# EAGLE board schmatic (EAGLE 9.6.2)
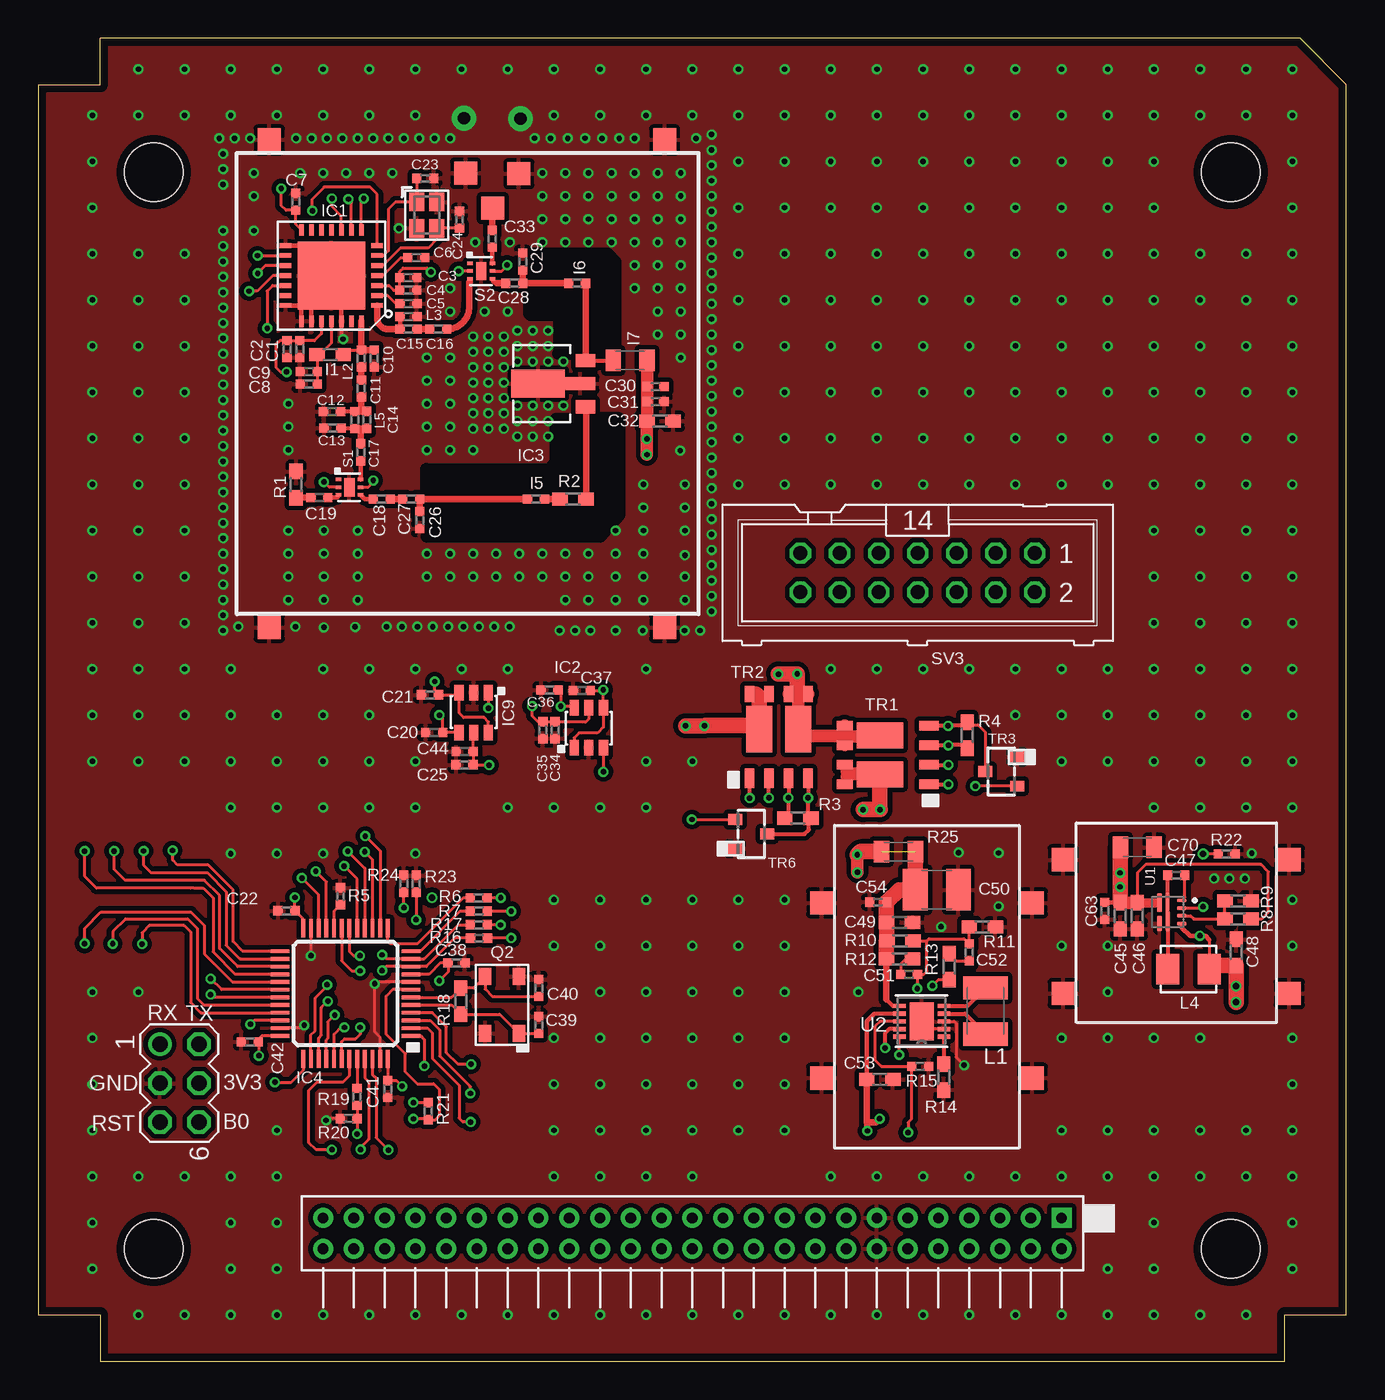
[diagram p0: board, top side]
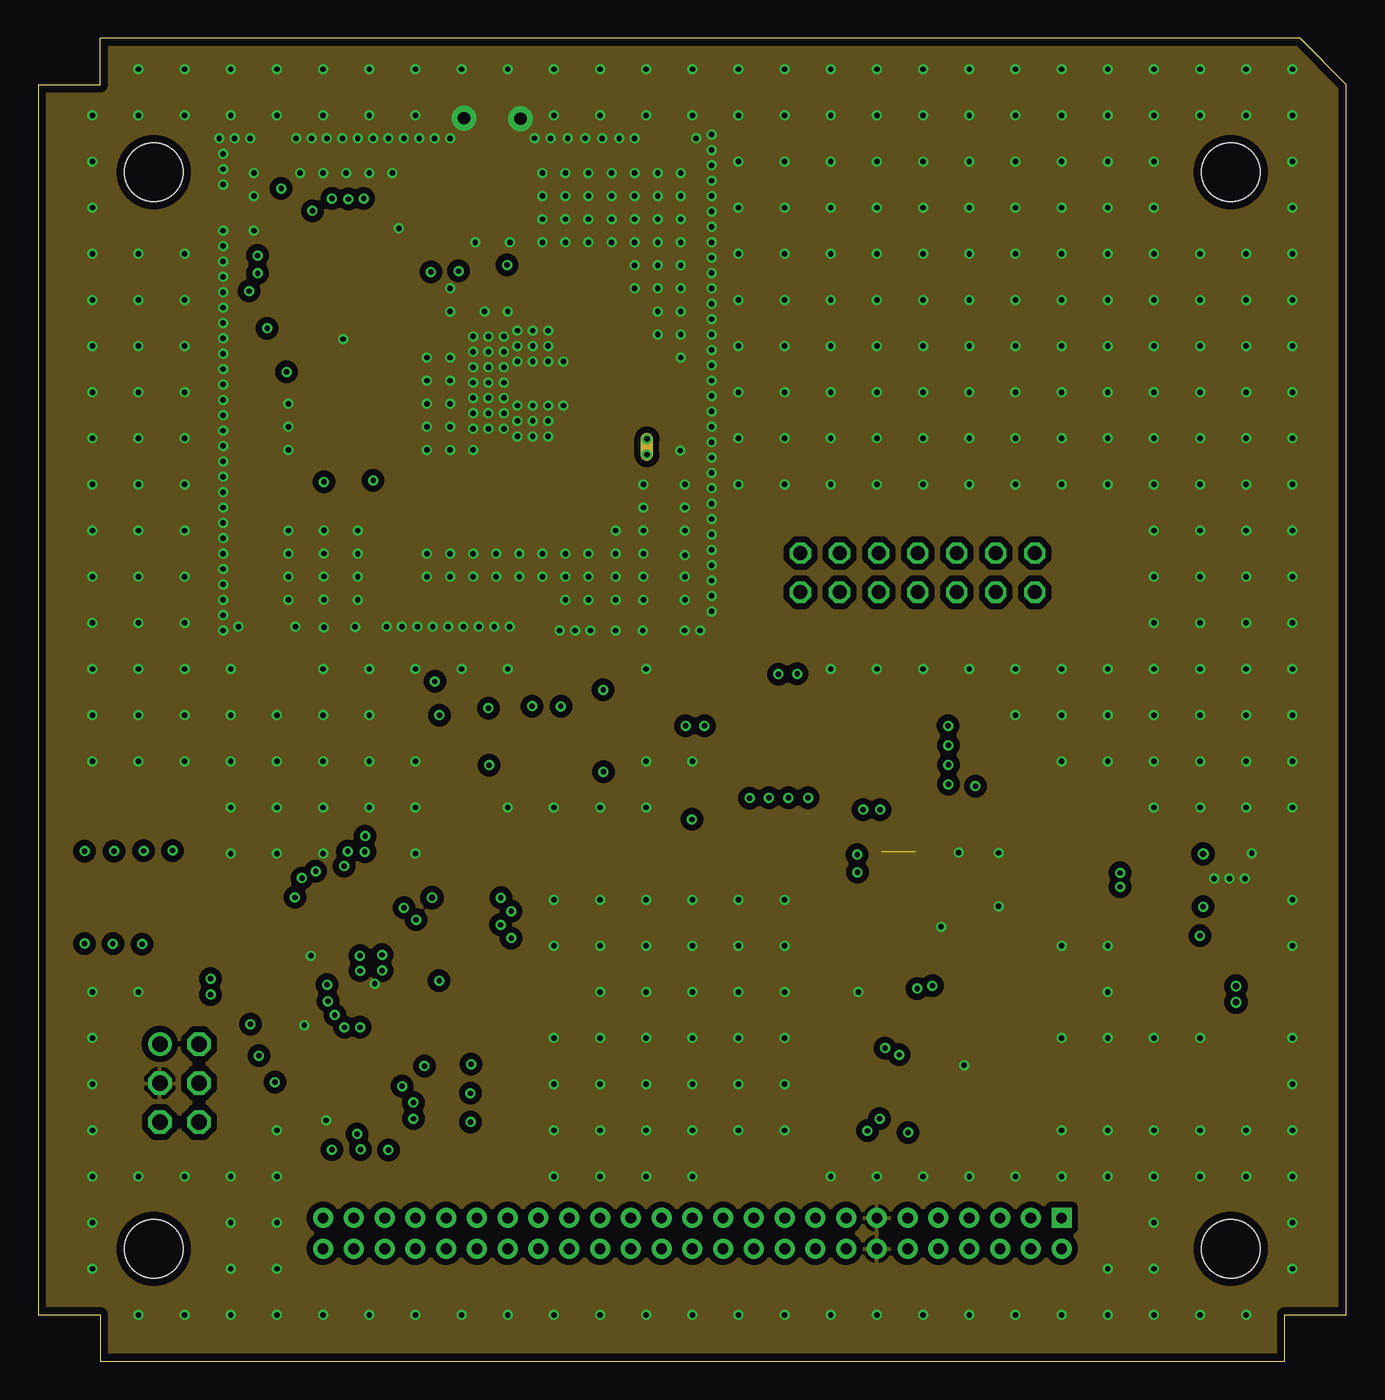
[diagram p1: board, inner layer Route2]
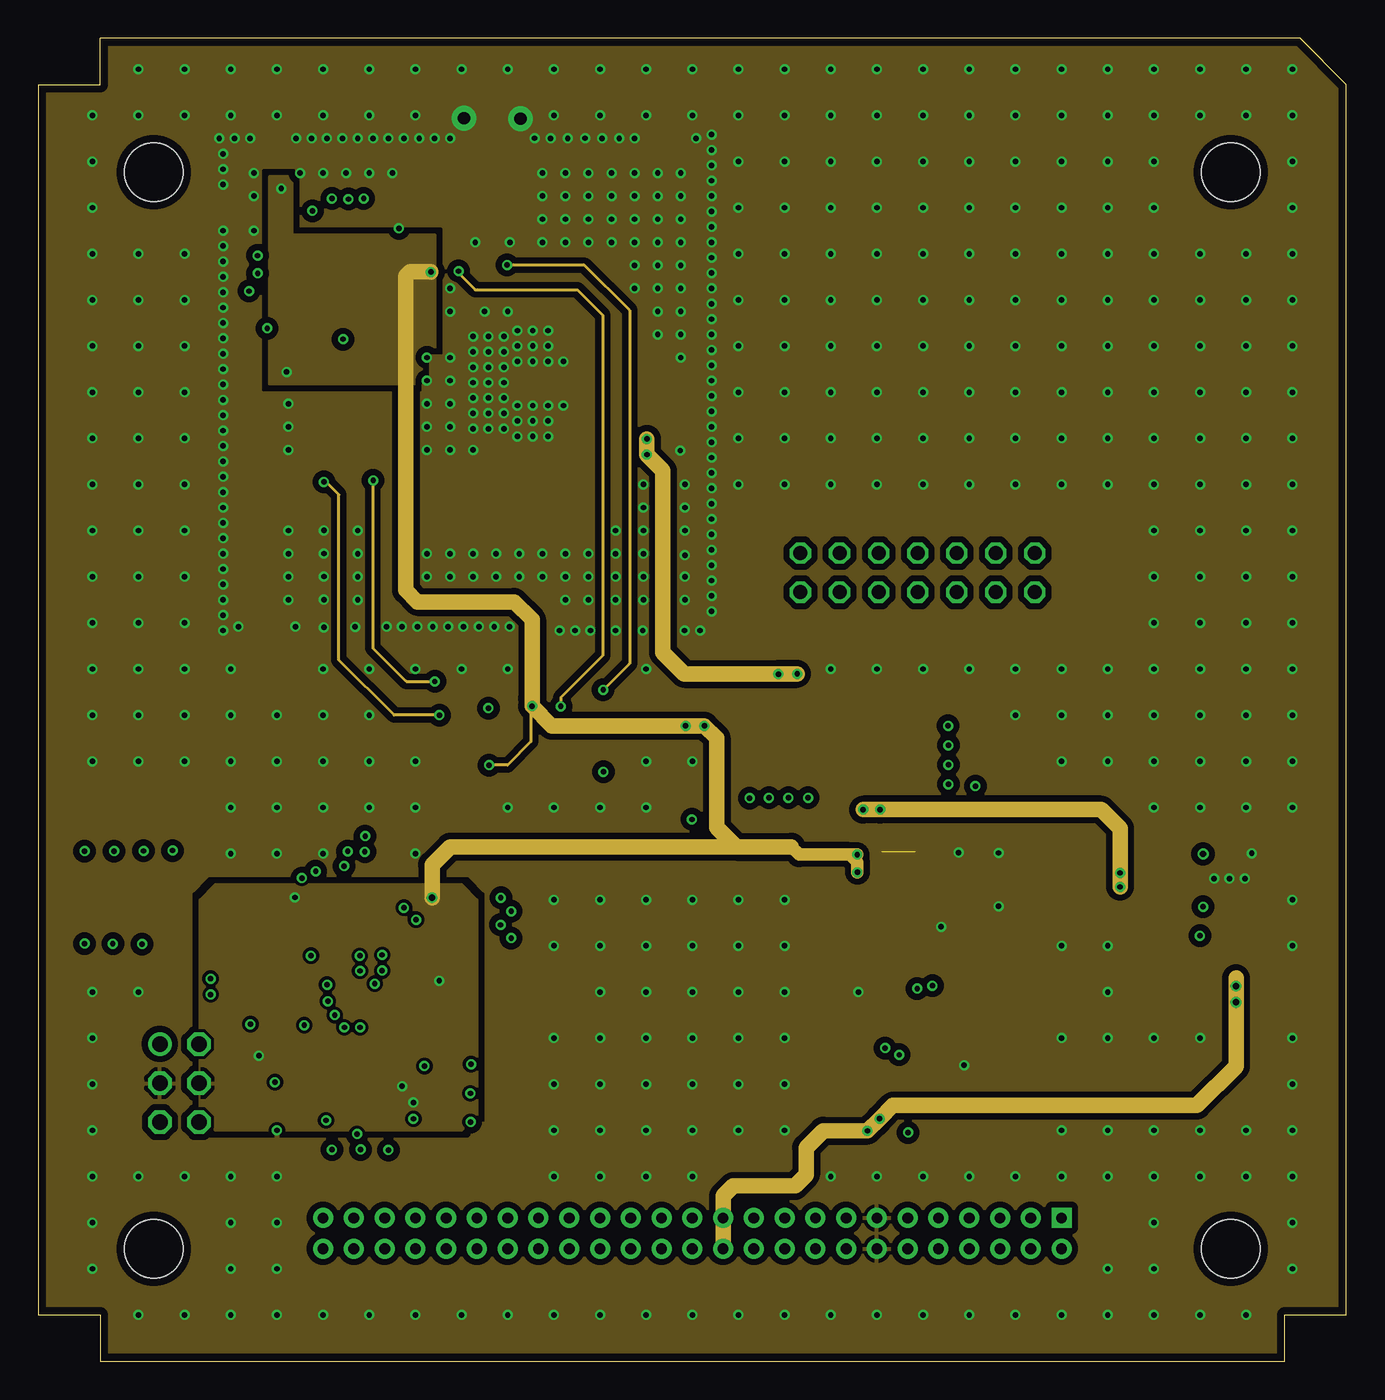
[diagram p2: board, inner layer Route15]
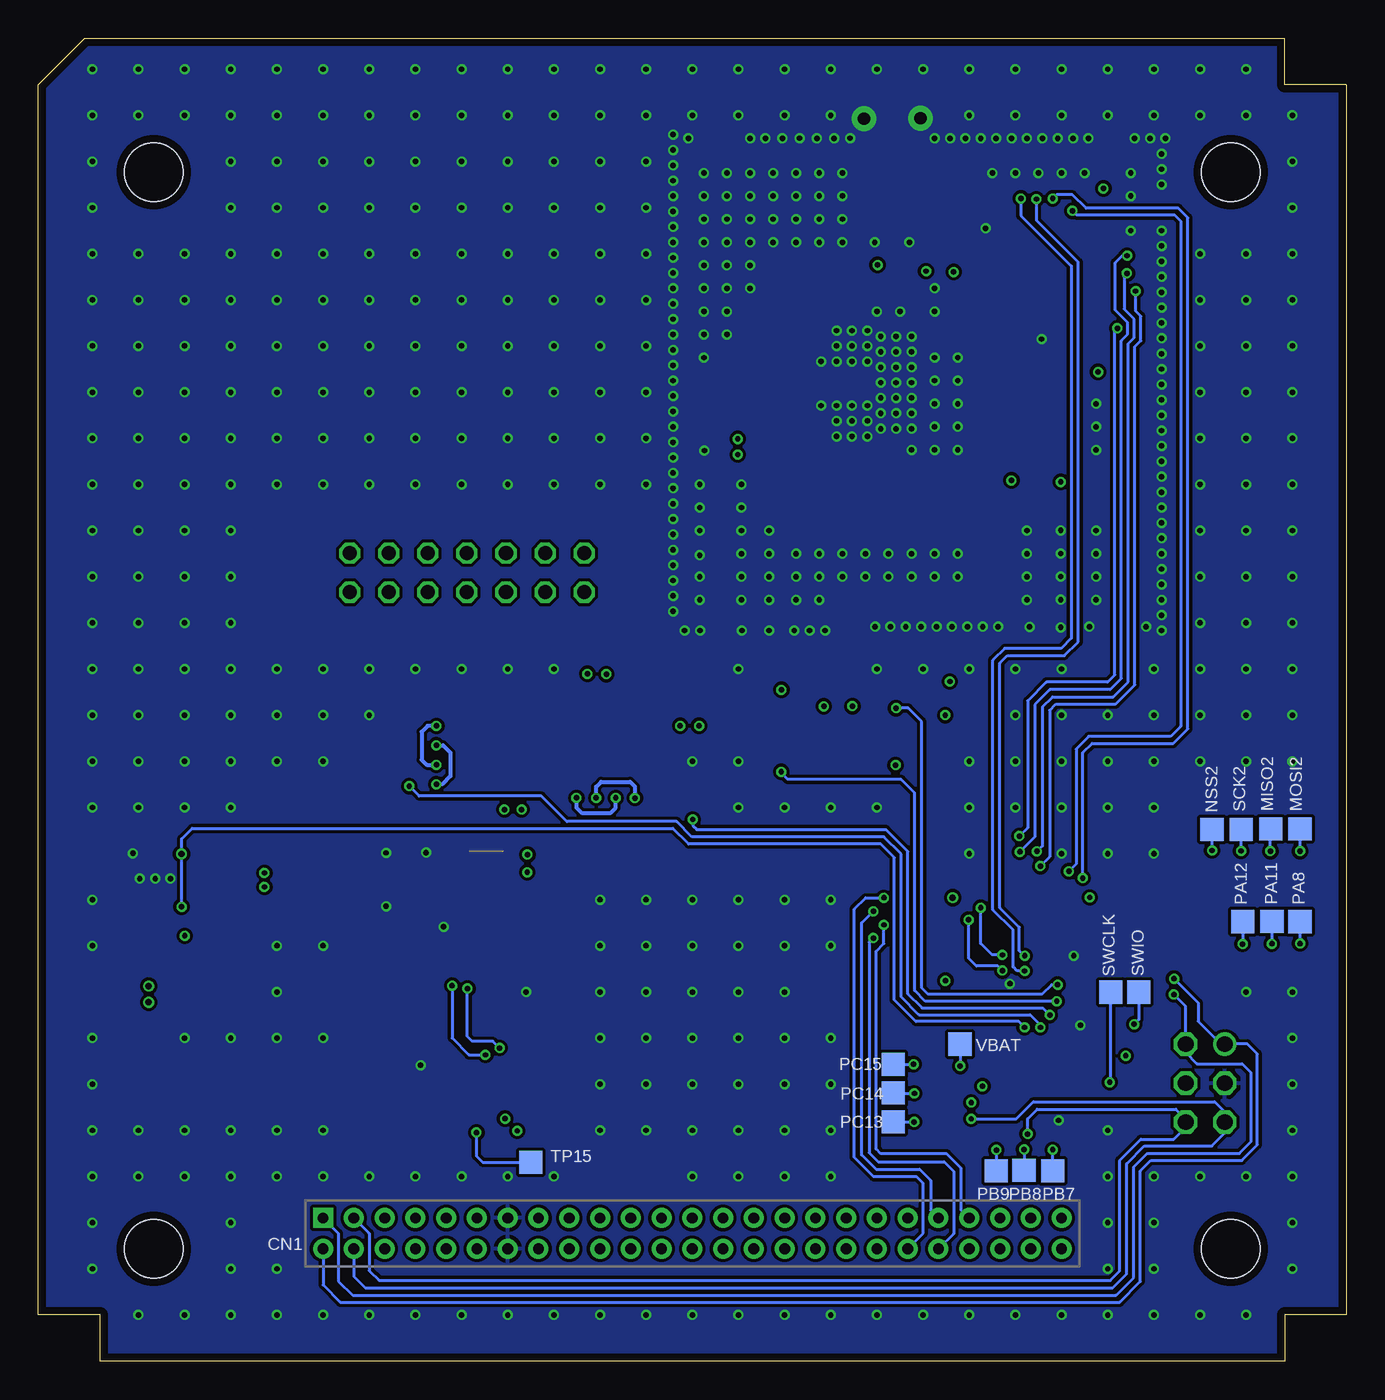
[diagram p3: board, bottom side, seen from below]

Size 85 x 86 mm. Coordinates in mm from the lower left corner, seen from the top.
Outline: 4,0 81,0 81,3 85,3 85,83 82,86 4,86 4,83 0,83 0,3 4,3 4,0
Copper layers (1+2*15+16): Top 0.018mm / dielectric 0.25mm / Route2 0.035mm / dielectric 1mm / Route15 0.035mm / dielectric 0.25mm / Bottom 0.018mm
Design rules "pban_5mil-l4": minimum track width 5mil, minimum drill 0.3mm, track to track 5mil, track to pad 0.229mm, pad to pad 5mil, via to via 5mil, smd to smd 5mil, copper to edge 0.5mm, drill to drill 0.5mm, minimum pad ring 0.15mm, minimum via ring 0.15mm, stop-mask expansion 4mil, vias tented up to drill 0.35mm, thermal gap 10mil
Net classes: 0 default: width 0.203 mm, drill 0.33 mm, clearance 0.203 mm; 2 gnd: width 0.305 mm, drill 0.33 mm, clearance 0.203 mm; 3 power usb: width 0.508 mm, drill 0.33 mm, clearance 0.203 mm
Holes 3.8 mm at 77.5,7.3 7.5,7.3 7.5,77.3 77.5,77.3
tRestrict: 19 lines

## Footprints (pad centres in the part's own frame; a part is rotated, then mirrored left to right if it is on the bottom)
M(1005)_US(0402) = smd 0.6 x 0.6: 1 -0.55,0; 2 0.55,0
CAP_(M1005)_0402 = smd 0.6 x 0.6: 1 -0.55,0; 2 0.55,0
M(1608)_US(0603) = smd 1 x 0.85: 1 -0.85,0; 2 0.85,0
C1210 = smd 1.6 x 2.7: 1 -1.4,0; 2 1.4,0
M(2012)_US(0805) = smd 1 x 1.4: 1 -1.1,0; 2 1.1,0
A3B-50PA-2DS(71) = drill 0.7 pad 1.3 square: 1 0,2 | drill 0.7 pad 1.3: 2 0,0; 3 2,2; 4 2,0; 5 4,2; 6 4,0; 7 6,2; 8 6,0; 9 8,2; 10 8,0; 11 10,2; 12 10,0; 13 12,2; 14 12,0; 15 14,2; 16 14,0; 17 16,2; 18 16,0; 19 18,2; 20 18,0; 21 20,2; 22 20,0; 23 22,2; 24 22,0; 25 24,2; 26 24,0; 27 26,2; 28 26,0; 29 28,2; 30 28,0; 31 30,2; 32 30,0; 33 32,2; 34 32,0; 35 34,2; 36 34,0; 37 36,2; 38 36,0; 39 38,2; 40 38,0; 41 40,2; 42 40,0; 43 42,2; 44 42,0; 45 44,2; 46 44,0; 47 46,2; 48 46,0; 49 48,2; 50 48,0
SX1278 = smd 0.75 x 0.3: 1 -2.975,1.95; 2 -2.975,1.3; 3 -2.975,0.65; 4 -2.975,0; 5 -2.975,-0.65; 6 -2.975,-1.3; 7 -2.975,-1.95; 15 2.975,-1.95; 16 2.975,-1.3; 17 2.975,-0.65; 18 2.975,0; 19 2.975,0.65; 20 2.975,1.3; 21 2.975,1.95 | smd 0.3 x 0.75: 8 -1.95,-2.975; 9 -1.3,-2.975; 10 -0.65,-2.975; 11 0,-2.975; 12 0.65,-2.975; 13 1.3,-2.975; 14 1.95,-2.975; 22 1.95,2.975; 23 1.3,2.975; 24 0.65,2.975; 25 0,2.975; 26 -0.65,2.975; 27 -1.3,2.975; 28 -1.95,2.975 | smd 4.4 x 4.4: 29 0,0
SOT-23-6 = smd 0.6 x 1: 1 -0.95,-1.3; 2 0,-1.3; 3 0.95,-1.3; 4 0.95,1.3; 5 0,1.3; 6 -0.95,1.3
ADL5324 = smd 0.86 x 1.27: 1 -1.5,0; 3 1.5,0 | smd 0.86 x 2: 2 0,0.365 | smd 1.8 x 3.48: 4 0,3.1
STM32F103C8T6 = smd 1.2 x 0.25: 1 -4.25,2.75; 2 -4.25,2.25; 3 -4.25,1.75; 4 -4.25,1.25; 5 -4.25,0.75; 6 -4.25,0.25; 7 -4.25,-0.25; 8 -4.25,-0.75; 9 -4.25,-1.25; 10 -4.25,-1.75; 11 -4.25,-2.25; 12 -4.25,-2.75; 25 4.25,-2.75; 26 4.25,-2.25; 27 4.25,-1.75; 28 4.25,-1.25; 29 4.25,-0.75; 30 4.25,-0.25; 31 4.25,0.25; 32 4.25,0.75; 33 4.25,1.25; 34 4.25,1.75; 35 4.25,2.25; 36 4.25,2.75 | smd 0.25 x 1.2: 13 -2.75,-4.25; 14 -2.25,-4.25; 15 -1.75,-4.25; 16 -1.25,-4.25; 17 -0.75,-4.25; 18 -0.25,-4.25; 19 0.25,-4.25; 20 0.75,-4.25; 21 1.25,-4.25; 22 1.75,-4.25; 23 2.25,-4.25; 24 2.75,-4.25; 37 2.75,4.25; 38 2.25,4.25; 39 1.75,4.25; 40 1.25,4.25; 41 0.75,4.25; 42 0.25,4.25; 43 -0.25,4.25; 44 -0.75,4.25; 45 -1.25,4.25; 46 -1.75,4.25; 47 -2.25,4.25; 48 -2.75,4.25
M(3225)_US(1210) = smd 1.5 x 2.9: 1 -1.5,0; 2 1.5,0
AMDLA3020S-1R5MT = smd 1.5 x 2: 1 -1.35,0; 2 1.35,0
TEST_POINT_1.5MM = smd 1.5 x 1.5: 1 0,0
NX2520SA = smd 1.2 x 1: 1 -0.85,-0.65; 2 0.85,-0.65; 3 0.85,0.65; 4 -0.85,0.65
ECS-80-18-30B-JEM-TR = smd 1.1 x 0.8: 1 -1.85,-1.1; 2 1.85,-1.1; 3 1.85,1.1; 4 -1.85,1.1
SKY13446 = smd 0.229 x 0.35: 1 0,0; 2 0.5,0; 3 1,0; 4 1,1.45; 5 0.5,1.45; 6 0,1.45 | smd 1.2 x 0.66: 7 0.5,0.725
MA03-2 = drill 1.016: 1 -2.54,-1.27 | drill 1.016 octagon: 2 -2.54,1.27; 3 0,-1.27; 4 0,1.27; 5 2.54,-1.27; 6 2.54,1.27
ML14 = drill 0.914 octagon: 1 -7.62,-1.27; 2 -7.62,1.27; 3 -5.08,-1.27; 4 -5.08,1.27; 5 -2.54,-1.27; 6 -2.54,1.27; 7 0,-1.27; 8 0,1.27; 9 2.54,-1.27; 10 2.54,1.27; 11 5.08,-1.27; 12 5.08,1.27; 13 7.62,-1.27; 14 7.62,1.27
SI7997DP-T1-GE3 = smd 1.27 x 0.61: 1 0,1.905; 2 0,0.635; 3 0,-0.635; 4 0,-1.905 | smd 1.02 x 0.61: 5 5.465,-1.905; 6 5.465,-0.635; 7 5.465,0.635; 8 5.465,1.905 | smd 3 x 1.7: 9 3.175,-1.27; 10 3.175,1.27
SOT346-R = smd 0.7 x 0.9: 1 0.95,-1.05; 2 -0.95,-1.05; 3 0,1.05
IC_TPS61230ARNSR = smd 0.25 x 0.6: 1 -0.75,0.9; 2 -0.25,0.9; 3 0.25,0.9; 4 0.75,0.9 | smd 2.5 x 0.279: 5 0,-0.015 | smd 1 x 0.33: 6 0.75,-0.54 | smd 1.219 x 0.33: 7 -0.6,-0.54
DFN-10_DD = smd 0.813 x 0.279: 1 -1.448,1; 2 -1.448,0.5; 3 -1.448,0; 4 -1.448,-0.5; 5 -1.448,-1; 6 1.448,-1; 7 1.448,-0.5; 8 1.448,0; 9 1.448,0.5; 10 1.448,1 | smd 1.575 x 2.489: 11 0,0

## Placement (x,y rotation side)
C1  0.1uF  [M(1005)_US(0402)]  16.99,65.8 270 top
C2  47pF  [M(1005)_US(0402)]  16.16,65.8 270 top
C3  0.1uF  [M(1005)_US(0402)]  24.04,70.44 0 top
C4  47pF  [M(1005)_US(0402)]  24.04,69.63 0 top
C5  0.1uF  [M(1005)_US(0402)]  24.05,68.76 0 top
C6  0.1uF  [M(1005)_US(0402)]  24.56,71.74 0 top
C7  0.1uF  [M(1005)_US(0402)]  16.72,75.38 90 top
C8  0.1uF  [M(1005)_US(0402)]  17.57,63.52 180 top
C9  47pF  [M(1005)_US(0402)]  17.57,64.34 180 top
C10  4.7pF  [M(1005)_US(0402)]  21.82,65.19 270 top
C11  47pF  [M(1005)_US(0402)]  20.99,63.24 270 top
C12  6.8pF  [M(1005)_US(0402)]  19.08,61.73 180 top
C13  6.8pF  [M(1005)_US(0402)]  19.11,60.66 180 top
C14  2.7pF  [M(1005)_US(0402)]  21.34,61.2 270 top
C15  4.7pF  [M(1005)_US(0402)]  24.05,67.09 0 top
C16  47pF  [M(1005)_US(0402)]  25.99,67.09 0 top
C17  47pF  [M(1005)_US(0402)]  20.94,59.09 270 top
C18  47pF  [M(1005)_US(0402)]  22.31,56.05 0 top
C19  47pF  [M(1005)_US(0402)]  18.26,56.14 180 top
C20  47pF  [M(1005)_US(0402)]  25.72,40.87 0 top
C21  47pF  [M(1005)_US(0402)]  25.45,43.32 180 top
C22  0.1uF  [M(1005)_US(0402)]  16.12,29.28 180 top
C23  15pF  [CAP_(M1005)_0402]  25.14,76.9 180 top
C24  15pF  [CAP_(M1005)_0402]  27.37,74.21 90 top
C25  0.1uF  [M(1005)_US(0402)]  27.69,38.77 180 top
C26  20pF  [M(1005)_US(0402)]  24.78,54.68 270 top
C27  20pF  [M(1005)_US(0402)]  24.23,56.05 0 top
C28  20pF  [M(1005)_US(0402)]  30.93,70.08 180 top
C29  6.2pF  [M(1005)_US(0402)]  31.48,71.48 90 top
C30  100pF  [M(1005)_US(0402)]  40.11,63.37 180 top
C31  0.01uF  [M(1005)_US(0402)]  40.11,62.39 180 top
C32  10uF  [M(1608)_US(0603)]  40.4,61.11 0 top
C33  47pF  [M(1005)_US(0402)]  29.5,72.97 90 top
C34  47pF  [M(1005)_US(0402)]  33.58,41.02 270 top
C35  0.1uF  [M(1005)_US(0402)]  32.79,41.02 270 top
C36  47pF  [M(1005)_US(0402)]  33.22,43.63 0 top
C37  47pF  [M(1005)_US(0402)]  35.32,43.61 180 top
C38  0.1uF  [M(1005)_US(0402)]  27.17,25.89 0 top
C39  20pF  [M(1005)_US(0402)]  32.52,21.85 90 top
C40  20pF  [M(1005)_US(0402)]  32.52,24.26 90 top
C41  0.1uF  [M(1005)_US(0402)]  22.7,17.69 270 top
C42  0.1uF  [M(1005)_US(0402)]  13.74,20.76 180 top
C44  47pF  [M(1005)_US(0402)]  27.7,39.63 180 top
C45  22uF  [M(1608)_US(0603)]  70.32,28.95 270 top
C46  22uF  [M(1608)_US(0603)]  71.43,28.95 270 top
C47  0.1uF  [M(1005)_US(0402)]  73.96,31.59 0 top
C48  10uF  [M(1608)_US(0603)]  77.85,26.58 90 top
C49  22uF  [M(1608)_US(0603)]  55.97,28.53 0 top
C50  100uF  [C1210]  58.39,30.65 0 top
C51  100pF  [M(1005)_US(0402)]  56.59,25.14 180 top
C52  1000pF  [M(1005)_US(0402)]  60.5,26.58 90 top
C53  10uF  [M(1608)_US(0603)]  54.69,18.32 0 top
C54  0.1uF  [M(1005)_US(0402)]  54.58,29.84 180 top
C63  0.1uF  [M(1005)_US(0402)]  69.3,29.27 270 top
C70  100uF  [M(2012)_US(0805)]  71.42,33.4 0 top
CN1  A3B-50PA-2DS(71)  [A3B-50PA-2DS(71)]  66.5,7.3 0 bottom
I1  82nH  [M(1608)_US(0603)]  18.96,65.43 0 top
I5  1.6nH  [M(1005)_US(0402)]  32.34,56.05 0 top
I6  5.6nH  [M(1005)_US(0402)]  35.01,70.08 180 top
I7  120nH  [M(2012)_US(0805)]  38.46,65.06 180 top
IC1  SX1278  [SX1278]  19.04,70.58 180 top
IC2  SN74LVC2G14DBVT  [SOT-23-6]  35.77,41.19 0 top
IC3  ADL5324  [ADL5324]  35.57,63.55 90 top
IC4  STM32F103C8T6  [STM32F103C8T6]  19.96,23.9 180 top
IC9  SN74LVC2G14DBVT  [SOT-23-6]  28.29,42.16 180 top
L1  CBC3225T150KR  [M(3225)_US(1210)]  61.56,22.76 90 top
L2  15nH  [M(1005)_US(0402)]  20.99,65.19 270 top
L3  18nH  [M(1005)_US(0402)]  24.05,67.92 0 top
L4  1uH  [AMDLA3020S-1R5MT]  74.76,25.48 0 top
L5  12nH  [M(1005)_US(0402)]  20.55,61.19 270 top
MISO2  TEST_POINT  [TEST_POINT_1.5MM]  4.9,34.6 90 bottom
MOSI2  TEST_POINT  [TEST_POINT_1.5MM]  3,34.6 90 bottom
NSS2  TEST_POINT  [TEST_POINT_1.5MM]  8.72,34.57 0 bottom
PA8  TEST_POINT  [TEST_POINT_1.5MM]  3,28.57 90 bottom
PA11  TEST_POINT  [TEST_POINT_1.5MM]  4.82,28.58 90 bottom
PA12  TEST_POINT  [TEST_POINT_1.5MM]  6.73,28.57 90 bottom
PB7  TEST_POINT  [TEST_POINT_1.5MM]  19.06,12.38 0 bottom
PB8  TEST_POINT  [TEST_POINT_1.5MM]  20.94,12.41 0 bottom
PB9  TEST_POINT  [TEST_POINT_1.5MM]  22.74,12.38 0 bottom
PC13  TEST_POINT  [TEST_POINT_1.5MM]  29.43,15.55 270 bottom
PC14  TEST_POINT  [TEST_POINT_1.5MM]  29.43,17.44 0 bottom
PC15  TEST_POINT  [TEST_POINT_1.5MM]  29.43,19.3 90 bottom
Q1  NX2520SA-32MHZ  [NX2520SA]  25.24,74.51 270 top
Q2  8MHZ_CRYSTAL  [ECS-80-18-30B-JEM-TR]  30.13,23.15 90 top
R1  50  [M(1608)_US(0603)]  16.74,56.99 270 top
R2  2  [M(1608)_US(0603)]  34.74,56.05 0 top
R3  22k  [M(1608)_US(0603)]  49.36,35.3 180 top
R4  22k  [M(1608)_US(0603)]  60.38,40.7 270 top
R5  100k  [M(1005)_US(0402)]  19.63,30.23 270 top
R6  100  [M(1005)_US(0402)]  28.61,30.12 180 top
R7  100  [M(1005)_US(0402)]  28.62,29.26 180 top
R8  316k  [M(1608)_US(0603)]  77.97,28.74 0 top
R9  100k  [M(1608)_US(0603)]  77.97,29.93 180 top
R10  820k  [M(1608)_US(0603)]  56,27.32 180 top
R11  180k  [M(1608)_US(0603)]  61.35,28.22 180 top
R12  15k  [M(1608)_US(0603)]  55.97,26.14 0 top
R13  49.9k  [M(1608)_US(0603)]  59.19,25.65 270 top
R14  332k  [M(1608)_US(0603)]  58.84,18.47 270 top
R15  10k  [M(1005)_US(0402)]  57.31,19.17 180 top
R16  100  [M(1005)_US(0402)]  28.63,27.5 180 top
R17  100  [M(1005)_US(0402)]  28.62,28.37 180 top
R18  1M  [M(1608)_US(0603)]  27.45,23.4 270 top
R19  100k  [M(1005)_US(0402)]  20.7,17.18 270 top
R20  10k  [M(1005)_US(0402)]  20.16,15.77 0 top
R21  10k  [M(1005)_US(0402)]  25.33,16.25 90 top
R22  10k  [M(1005)_US(0402)]  77.23,32.97 180 top
R23  100K  [M(1005)_US(0402)]  24.56,31.04 270 top
R24  100K  [M(1005)_US(0402)]  23.75,31.04 270 top
R25  NS  [M(2012)_US(0805)]  55.9,33.13 0 top
S1  SKY13446  [SKY13446]  19.49,57.32 270 top
S2  SKY13446  [SKY13446]  28.06,71.37 270 top
SCK2  TEST_POINT  [TEST_POINT_1.5MM]  6.83,34.58 90 bottom
SV2  [MA03-2]  9.16,18.07 270 top
SV3  [ML14]  57.15,51.26 180 top
SWCLK  TEST_POINT  [TEST_POINT_1.5MM]  15.3,23.99 270 bottom
SWIO  TEST_POINT  [TEST_POINT_1.5MM]  13.47,23.99 90 bottom
TP1  TEST_POINT  [TEST_POINT_1.5MM]  50.9,29.8 0 top
TP2  TEST_POINT  [TEST_POINT_1.5MM]  50.9,18.4 0 top
TP3  TEST_POINT  [TEST_POINT_1.5MM]  64.6,18.4 0 top
TP4  TEST_POINT  [TEST_POINT_1.5MM]  66.6,32.6 0 top
TP5  TEST_POINT  [TEST_POINT_1.5MM]  66.6,23.9 0 top
TP6  TEST_POINT  [TEST_POINT_1.5MM]  81.3,23.9 0 top
TP7  TEST_POINT  [TEST_POINT_1.5MM]  81.3,32.6 0 top
TP8  TEST_POINT  [TEST_POINT_1.5MM]  40.7,47.7 0 top
TP9  TEST_POINT  [TEST_POINT_1.5MM]  15,47.7 0 top
TP10  TEST_POINT  [TEST_POINT_1.5MM]  40.7,79.4 0 top
TP11  TEST_POINT  [TEST_POINT_1.5MM]  15,79.4 0 top
TP12  TEST_POINT  [TEST_POINT_1.5MM]  27.76,77.24 0 top
TP13  TEST_POINT  [TEST_POINT_1.5MM]  31.23,77.2 0 top
TP14  TEST_POINT  [TEST_POINT_1.5MM]  29.52,74.96 0 top
TP15  TEST_POINT  [TEST_POINT_1.5MM]  53,12.92 0 bottom
TP17  TEST_POINT  [TEST_POINT_1.5MM]  64.6,29.8 0 top
TR1  SI7997DP-T1-GE3  [SI7997DP-T1-GE3]  57.87,39.41 180 top
TR2  SI7997DP-T1-GE3  [SI7997DP-T1-GE3]  48.12,37.91 90 top
TR3  DTC144EKA  [SOT346-R]  62.58,38.33 90 top
TR6  DTC144EKA  [SOT346-R]  46.33,34.27 270 top
U1  TPS61230ARNSR  [IC_TPS61230ARNSR]  73.41,29.2 270 top
U2  LTC3536EDD  [DFN-10_DD]  57.41,22.09 180 top
VBAT  TEST_POINT  [TEST_POINT_1.5MM]  25.1,20.61 0 bottom

## Library data of the parts
C1-C22 C25-C42 C44-C49 C51-C54 C63 C70 I1 I5-I7 L1-L3 L5 R1-R25 = Tharindu_lib
C23 C24 IC1-IC4 IC9 L4 MISO2 MOSI2 NSS2 PA8 PA11 PA12 PB7-PB9 PC13-PC15 Q1 Q2 S1 S2 SCK2 SWCLK SWIO TP1-TP15 TP17 TR1 TR2 VBAT = Tharindu
C50 = adafruit
CN1 = Tharindu1
SV2 = con-lstb; OC_FARNELL: unknown; OC_NEWARK: unknown
SV3 = con-ml; OC_FARNELL: unknown; OC_NEWARK: unknown
TR3 TR6 = BIRDS3_CAM_MSN
U1 = TPS61230ARNSR; AVAILABILITY: In Stock; DESCRIPTION: 5-V/6-A High Efficiency Step-Up Converter in 2.0-mm x 2.0-mm QFN Package; MF: Texas Instruments; MP: TPS61230ARNSR; PACKAGE: VQFN-HR-7 Texas Instruments; PRICE: None; PURCHASE-URL: https://pricing.snapeda.com/search/part/TPS61230ARNSR/?ref=eda
U2 = LTC3536EDD_TRPBF; AVAILABILITY: In Stock; DESCRIPTION: 1A Low Noise, Buck-Boost DC/DC Converter; MF: Analog Devices; MP: LTC3536EDD#TRPBF; PACKAGE: DFN -10 Analog Devices; PRICE: None; PURCHASE-URL: https://pricing.snapeda.com/search/part/LTC3536EDD#TRPBF/?ref=eda

## Nets
5VB_EN: IC4.42 R22.2 U1.2
+3V1: C5.1 IC1.2
+3V2: C6.1 IC1.4
+3V3: C1.1 C2.1 C3.1 C4.1 C7.1 C22.1 C25.1 C34.1 C35.1 C38.1 C41.1 C42.1 C44.1 C49.1 C50.1 C54.1 IC1.3 IC1.14 IC1.24 IC2.5 IC4.9 IC4.24 IC4.36 IC4.48 IC9.5 R10.2 R12.1 R21.2 R25.1 R25.2 SV2.4 TR2.7 TR2.8 TR2.10 U2.6
+3V4: C8.1 C9.1 I1.1 IC1.25
+3V5: C30.1
+5V: C45.1 C46.1 C63.1 C70.1 R8.2 TR1.7 TR1.8 TR1.10 U1.7
AMP_3VEN: IC4.40 TR6.2
AMP_5VEN: IC4.41 TR3.2
AMPIN: C18.2 C27.1
AMPPWR: C30.2 C31.2 C32.1 I7.1 TR1.5 TR1.6 TR1.9 TR2.5 TR2.6 TR2.9
C_UART_RX: IC4.13 R6.2
C_UART_TX: IC4.12 R7.2
CP_DIO_1: CN1.42 R16.1
CP_DIO_2: CN1.43 R17.1
CP_UART_RX: CN1.40 R6.1
CP_UART_TX: CN1.41 R7.1
CW_KEY: IC4.38 IC9.1
DIO0: IC1.8 IC4.19
DIO1: IC1.9 IC4.18
DIO2: IC1.10 IC4.22
GND: C1.2 C2.2 C3.2 C4.2 C5.2 C6.2 C7.2 C8.2 C9.2 C10.2 C12.2 C13.2 C20.1 C21.2 C22.2 C23.1 C24.2 C25.2 C26.2 C29.2 C31.1 C32.2 C34.2 C35.2 C36.1 C37.2 C38.2 C39.2 C40.2 C41.2 C42.2 C44.2 C45.2 C46.2 C48.2 C49.2 C50.2 C53.2 C54.2 C63.2 C70.2 CN1.13 CN1.14 IC1.15 IC1.21 IC1.22 IC1.23 IC1.26 IC1.29 IC2.2 IC3.2 IC3.4 IC4.8 IC4.23 IC4.35 IC4.47 IC9.2 L3.2 Q1.2 Q1.4 Q2.2 Q2.4 R1.1 R5.1 R9.1 R11.1 R14.2 R15.1 R20.1 R22.1 R23.1 R24.1 S1.7 S2.7 SV2.3 TP1.1 TP2.1 TP3.1 TP4.1 TP5.1 TP6.1 TP7.1 TP8.1 TP9.1 TP10.1 TP11.1 TP12.1 TP13.1 TP17.1 TR3.1 TR6.1 U1.6 U2.2 U2.3 U2.11
MISO: IC1.17 IC4.16
MOSI: IC1.18 IC4.17
N$1: C11.1 L2.2
N$2: C11.2 C12.1 C14.1 L5.1
N$3: C13.1 C14.2 C17.1 L5.2
N$4: C17.2 S1.6
N$5: C15.2 C16.1
N$6: C18.1 S1.4
N$7: C19.1 S1.3
N$8: C19.2 R1.2
N$9: C26.1 C27.2 I5.1
N$10: C37.1 IC2.1 IC2.4 S2.5
N$11: C20.2 IC9.4 S1.2
N$12: I5.2 R2.1
N$13: IC3.1 R2.2
N$14: I6.1 I7.2 IC3.3
N$15: C28.1 C29.1 I6.2
N$16: C28.2 S2.4
N$17: C33.1 S2.6
N$18: R4.2 TR1.1 TR1.3
N$19: R3.2 TR2.1 TR2.3
N$20: C36.2 IC2.6 S2.2
N$22: R4.1 TR1.2 TR1.4 TR3.3
N$23: R3.1 TR2.2 TR2.4 TR6.3
N$24: IC4.10 R16.2 R23.2
N$25: IC4.20 R5.2
N$26: IC4.11 R17.2 R24.2
N$27: C21.1 IC9.3 IC9.6 S1.5
N$28: C39.1 IC4.5 Q2.1 R18.2
N$29: C40.1 IC4.6 Q2.3 R18.1
N$30: L1.1 U2.4
N$31: R8.1 R9.2 U1.3
N$32: C47.1 L4.1 U1.5
N$33: L1.2 U2.5
N$34: C47.2 U1.1
N$35: IC4.1 VBAT.1
N$36: C51.2 R12.2
N$37: C51.1 C52.2 R10.1 R11.2 U2.9
N$38: IC4.44 R19.1
N$39: C52.1 R13.1
N$40: R13.2 U2.10
N$41: R14.1 U2.1
N$42: IC4.4 PC15.1
N$44: IC4.3 PC14.1
N$45: IC4.2 PC13.1
N$46: IC4.27 MISO2.1
N$47: IC4.28 MOSI2.1
N$48: IC4.33 PA12.1
N$49: IC4.32 PA11.1
N$50: IC4.29 PA8.1
N$68: IC4.26 SCK2.1
N$69: IC4.25 NSS2.1
NSSL: IC1.19 IC4.14
NTRX_EN: R15.2 TP15.1 U2.8
PB7: IC4.43 PB7.1
PB8: IC4.45 PB8.1
PB9: IC4.46 PB9.1
PROG_BOOT0: CN1.3 R19.2 R20.2 SV2.6
PROG_RST: CN1.4 IC4.7 R21.1 SV2.5
PROG_RX: CN1.1 IC4.31 SV2.2
PROG_TX: CN1.2 IC4.30 SV2.1
RF_RX: C16.2 S2.3
RFI: C15.1 IC1.1 L3.1
RFO: C10.1 I1.2 IC1.28 L2.1
RST_L: IC1.7 IC4.21
RX/TX_CON: IC2.3 IC4.39
SCK: IC1.16 IC4.15
SWCLK: IC4.37 SWCLK.1
SWIO: IC4.34 SWIO.1
TOANT: C33.2 TP14.1
UNREG1: C48.1 C53.1 CN1.23 CN1.24 L4.2 U1.4 U2.7
XTA: C24.1 IC1.5 Q1.3
XTB: C23.2 IC1.6 Q1.1

## Tracks (layer width: path | path; a pad name or v marks a point on that pad's centre or on a via)
5VB_EN  (via drill 0.35, 0.41)
  Top 0.203: IC4.42 19.71,20.77 19.9,20.96 20.62,20.96 20.9,21.24 v20.9,21.7 | U1.2 75.61,29.45 v75.7,29.54 | R22.2 v75.7,32.97
  Bottom 0.203: v20.9,21.7 21.28,22.08 27.97,22.08 29.36,23.47 29.36,32.74 30.24,33.62 42.74,33.62 43.76,34.64 75.01,34.64 75.7,33.95 v75.7,32.97 v75.7,29.54
+3V1
  Top 0.203: C5.1 23.22,68.76 22.7,69.28 IC1.2
+3V2
  Top 0.203: IC1.4 22.38,70.58 23.54,71.74 C6.1
+3V3  (via drill 0.35, 0.41)  (1 unrouted)
  Top 0.203: IC1.3 22.79,69.93 23.09,69.63 C4.1 C3.1 23.49,70.86 23.7,71.07 25.27,71.07 v25.51,70.83 v25.51,70.82 | IC1.24 18.39,66.8 17.94,66.35 C1.1 C2.1 15.67,66.35 15.43,66.11 15.43,64.63 15.74,64.32 v16.13,64.32 | IC2.5 35.77,41.75 35.57,41.55 33.6,41.55 C34.1 C35.1 32.48,41.57 32.09,41.96 v32.09,42.58 | IC1.14 16.72,73.92 C7.1 16.09,74.83 15.78,75.14 v15.78,76.24 | U2.6 55.53,23.09 | IC9.5 28.25,40.82 C44.1 C25.1 29.27,38.77 v29.29,38.75 | IC4.24 17.21,28.74 C22.1 v16.67,30.15 | IC4.9 25.39,25.15 26.13,25.89 C38.1 26.62,25.3 v26.05,24.73 | IC4.48 C41.1 23.27,18.24 v23.64,17.87 | IC4.36 14.52,21.15 14.29,20.92 C42.1 14.33,20.72 v14.33,19.85 | R21.2 v24.38,16.8 v24.37,16.81
  Top 0.254: 55.53,23.09 55.12,23.5
  Top 0.305: 55.12,27.29 R10.2
  Top 0.406: 55.12,23.5 R12.1
  Top 0.508: TR2.8 46.63,43.38 TR2.7 | 47.09,41.73 47.36,41.46 46.98,41.09 TR2.10
  Top 0.813: 53.23,32.6 53.22,32.61 v53.22,32.93 v53.23,32.92 v53.23,31.78
  Top 1.016: v42.06,41.31 v43.29,41.31 43.3,41.33 46.61,41.33 TR2.10 46.85,43.16 46.63,43.38 | R12.1 55.12,27.29 | R10.2 55.15,28.5 C49.1 C54.1 55.94,30.65 C50.1 R25.2 | R25.1 53.44,33.13 v53.23,32.92
  Route15 0.203: v29.29,38.75 30.49,38.75 32.01,40.27 32.01,42.65 32.09,42.73 32.09,43.09
  Route15 0.813: 52.71,32.93 49.44,32.93 48.94,33.43 | 52.71,32.93 v53.22,32.93 | 52.71,32.93 53.23,32.41 v53.23,31.78
  Route15 1.016: 45.36,33.43 44.08,34.71 44.08,40.52 v43.29,41.31 v42.06,41.31 33.35,41.31 v32.08,42.58 v32.09,42.58 32.09,43.09 32.09,48.2 30.92,49.37 24.64,49.37 23.88,50.12 23.88,70.54 24.17,70.83 v25.5,70.83 v25.51,70.82 | 45.36,33.43 48.94,33.43 | v25.58,30.13 25.58,32.26 26.75,33.43 45.36,33.43
  pour Route15 (isolate 0.406): 25.78,73.22 16.5,73.22 16.5,77 15,77 15,63.55 25.78,63.55
  pour Route15: 11.5,31 27.5,31 28.5,30 28.5,16 27.5,15 11.5,15 10.5,16 10.5,30
+3V4
  Top 0.203: IC1.25 19.04,66.2 18.27,65.43 I1.1 C9.1 C8.1
+5V  (via drill 0.35)
  Top 0.203: R8.2 79.51,28.74 79.95,29.18 79.95,31.82 79.48,32.29 71.97,32.29 71.43,31.75 C46.1
  Top 0.254: U1.7 72.58,29.8
  Top 0.305: C63.1 70.3,29.82 C45.1
  Top 0.508: TR1.7 52.41,38.35 | 52.41,38.35 52.41,38 | 52.41,38 TR1.8 | 52.41,38 54.7,38 TR1.10 54.48,38.35 52.41,38.35
  Top 0.61: 72.58,29.8 C46.1
  Top 0.813: C45.1 C46.1
  Top 1.016: TR1.10 54.7,35.88 v54.71,35.86 v53.6,35.86 | C45.1 v70.32,31.73 v70.31,31.74 C70.1
  Route15 1.016: v70.31,30.83 v70.31,31.74 70.31,34.64 69.09,35.86 v54.71,35.86 v53.6,35.86
AMP_3VEN  (via drill 0.35)
  Top 0.203: v19.26,22.5 18.8,22.04 18.8,20.97 18.71,20.88 IC4.40 | v42.47,35.22 TR6.2
  Bottom 0.203: v19.26,22.5 19.72,22.96 27.56,22.96 28.48,23.88 28.48,33.12 29.92,34.56 42.22,34.56 42.47,34.81 v42.47,35.22
AMP_5VEN  (via drill 0.35)
  Top 0.203: TR3.2 v60.9,37.38 | IC4.41 19.21,21.25 19.66,21.7 v19.88,21.7
  Bottom 0.203: v60.9,37.38 60.26,36.74 52.31,36.74 50.65,35.08 43.52,35.08 42.53,34.09 30.06,34.09 28.93,32.96 28.93,23.68 27.77,22.52 20.55,22.52 19.88,21.85 v19.88,21.7
AMPIN
  Top 0.42: C18.2 C27.1
AMPPWR  (via drill 0.35)
  Top 0.203: v48.09,44.66 v48.1,44.67 48.1,44.69
  Top 0.254: TR2.9 | TR2.9 49.18,41.29 48.76,41.72 | 50.02,41.73 TR2.9
  Top 0.813: TR2.6 49.38,43.38 | 49.38,43.38 TR2.5 | TR1.5 52.41,40.62 | TR1.6 52.41,40.62 | TR1.9 54.63,40.62 52.41,40.62 | 52.41,40.62 52.37,40.66 49.81,40.66 49.18,41.29 | TR2.9 49.39,43.37 49.38,43.38 | v39.55,58.94 v39.55,59.96 C32.1 C31.2 C30.2 I7.1
  Top 1.016: 49.38,43.38 49.32,43.44 v49.32,44.69 48.1,44.69
  Route2 0.813: v39.55,58.94 v39.55,59.96
  Route15 1.016: v39.55,59.96 v39.55,58.95 | 48.09,44.69 v49.32,44.69 41.96,44.69 40.59,46.06 40.59,57.9 v39.55,58.94
C_UART_RX
  Top 0.203: R6.2 27.61,30.12 24.64,27.14 22.88,27.14 22.71,27.31 IC4.13
C_UART_TX
  Top 0.203: IC4.12 24.82,26.65 27.43,29.26 R7.2
CP_DIO_1  (via drill 0.35)
  Top 0.203: v30.73,27.5 R16.1
  Bottom 0.203: v30.73,27.5 31,27.23 31,13.54 30.43,12.97 26.14,12.97 25.51,12.34 25.51,8.29 CN1.42
CP_DIO_2  (via drill 0.35)
  Top 0.203: v30.04,28.36 R17.1
  Bottom 0.203: CN1.43 25.05,9.85 25.05,12.56 25.97,13.48 30.24,13.48 30.55,13.79 30.55,26.64 30.04,27.15 v30.04,28.36
CP_UART_RX  (via drill 0.35)
  Top 0.203: v30.05,30.12 R6.1
  Bottom 0.203: CN1.40 27.49,8.31 27.49,11.56 27.91,11.98 30.72,11.98 31.97,13.24 31.97,29.39 31.24,30.12 v30.05,30.12
CP_UART_TX  (via drill 0.35)
  Top 0.203: v30.73,29.25 R7.1
  Bottom 0.203: CN1.41 27.01,9.81 27.01,11.75 27.73,12.47 30.56,12.47 31.49,13.4 31.49,28.49 v30.73,29.25
CW_KEY  (via drill 0.35)
  Top 0.203: IC9.1 29.24,42.46 v29.25,42.45 | IC4.38 17.71,21.21 17.98,21.48 17.98,23.61 18.76,24.39 v18.76,24.47
  Bottom 0.203: v18.76,24.47 19.14,24.47 19.77,23.84 27.17,23.84 27.6,24.27 27.6,41.58 28.47,42.45 v29.25,42.45
DIO0  (via drill 0.35)
  Top 0.203: IC1.8 20.99,75.44 v21.14,75.59 | IC4.19 19.71,26.02 20.36,25.37 v20.9,25.37
  Bottom 0.203: v21.14,75.59 21.14,74.48 17.86,71.2 17.86,47.01 18.53,46.34 22.2,46.34 22.96,45.57 22.96,29.34 21.65,28.04 21.65,25.62 21.4,25.37 v20.9,25.37
DIO1  (via drill 0.35)
  Top 0.203: IC1.9 20.34,75.35 v20.14,75.55 | IC4.18 20.21,26.63 20.49,26.35 v20.89,26.35
  Bottom 0.203: v20.14,75.55 20.14,74.17 17.42,71.45 17.42,46.76 18.31,45.87 22.02,45.87 22.51,45.38 22.51,29.47 21.24,28.2 21.24,26.68 20.91,26.35 v20.89,26.35
DIO2  (via drill 0.35)
  Top 0.203: IC1.10 19.69,74.46 19.07,75.08 v19.07,75.59 | v17.12,31.41 18.21,30.32 IC4.22
  Bottom 0.203: v19.07,75.59 18.82,75.84 17.79,75.84 16.9,74.95 10.9,74.95 10.29,74.34 10.29,41.11 11.23,40.17 16.52,40.17 17.12,39.57 v17.12,31.41
GND  (via drill 0.35, 0.8 pad 1.6)
  Top 0.203: U2.2 57.91,21.59 U2.11 | IC4.23 v17.71,26.36 | IC4.8 21.97,24.65 v21.86,24.54 v21.85,24.53 21.85,21.41 22.21,21.05 IC4.47 | v17.28,21.84 17.09,21.65 IC4.35 | R20.1 18.82,15.78 v18.69,15.65 | U2.3 59.52,22.09 59.65,21.96 59.65,19.75 v60.16,19.24
  Top 0.254: 19.69,69.93 IC1.29 | IC1.26 19.69,66.56 v19.8,66.45
  Top 0.305: IC1.23 17.74,69.05 | 17.74,69.05 17.74,69.28 | 17.74,69.28 IC1.29 | IC1.22 17.09,68.63 17.74,69.28 | IC1.21 17.32,68.63 17.74,69.05 | IC1.26 19.69,69.93 | IC1.15 17.75,72.53 18.78,71.5
  other vias: 76.42,31.37 77.41,31.37 78.42,31.37 23.43,73.65 12,57.5 12,58.5 12,59.5 12,60.5 12,61.5 12,56.5 12,55.5 12,54.5 12,53.5 12,52.5 12,51.5 12,50.5 12,49.5 12,48.5 12,47.5 13,47.75 16.7,47.75 42,47.5 43,47.5 43.75,48.75 43.75,49.75 43.75,50.75 43.75,51.75 43.75,52.75 43.75,53.75 43.75,54.75 43.75,55.75 43.75,56.75 43.75,57.75 43.75,58.75 43.75,59.75 43.75,66.75 43.75,67.75 43.75,68.75 43.75,69.75 43.75,70.75 43.75,71.75 43.75,60.75 43.75,61.75 43.75,62.75 43.75,63.75 43.75,64.75 43.75,65.75 18.75,79.5 17.75,79.5 16.75,79.5 13.75,79.5 24.75,79.5 23.75,79.5 22.75,79.5 21.75,79.5 20.75,79.5 19.75,79.5 26.75,79.5 25.75,79.5 36.64,79.5 35.53,79.51 34.4,79.5 33.29,79.5 32.25,79.51 43.75,72.75 43.75,73.75 43.75,74.75 43.75,75.75 43.75,76.75 43.75,77.75 42.75,79.5 38.75,79.5 37.75,79.5 43.75,78.75 43.75,79.75 12,68.5 12,69.5 12,70.5 12,71.5 12,72.5 12,73.5 12,62.5 12,63.5 12,64.5 12,65.5 12,66.5 12,67.5 12,76.5 12,77.5 12,78.5 12.75,79.5 11.75,79.5 34.12,62.12 30.25,63.62 30.25,62.62 30.25,64.62 31.12,62.12 32.12,62.12 33.12,62.12 31.12,65 32.12,65 33.12,65 34.12,65 33.12,66 32.12,66 31.12,66 33.12,61.12 32.12,61.12 31.12,61.12 29.25,63.62 29.25,62.62 29.25,64.62 30.25,65.62 29.25,65.62 30.25,61.62 29.25,61.62 31.12,67 32.12,67 33.12,67 30.25,66.62 29.25,66.62 29.25,60.62 30.25,60.62 31.12,60.12 32.12,60.12 33.12,60.12 23.62,47.75 22.62,47.75 20.57,47.74 39.27,47.5 35.88,47.5 34.88,47.5 33.88,47.5 24.62,47.75 25.62,47.75 26.62,47.75 27.62,47.75 28.62,47.75 29.62,47.75 30.62,47.75 28.25,63.62 28.25,62.62 28.25,64.62 28.25,65.62 28.25,61.62 28.25,66.62 28.25,60.62 18.55,47.71 37.52,47.5 41.75,77.25 40.25,77.25 38.75,77.25 37.25,77.25 35.75,77.25 34.25,77.25 32.75,77.25 32.75,74.25 32.75,75.75 34.25,75.75 34.25,74.25 34.25,72.75 35.75,72.75 37.25,72.75 37.25,74.25 35.75,74.25 35.75,75.75 37.25,75.75 38.75,75.75 40.25,75.75 41.75,75.75 38.75,74.25 38.75,72.75 38.75,71.25 38.75,69.75 40.25,69.75 40.25,71.25 40.25,72.75 40.25,74.25 41.75,74.25 41.75,72.75 41.75,71.25 41.75,69.75 41.75,68.25 41.75,66.75 41.75,65.25 40.25,66.75 40.25,68.25 23,77.25 21.5,77.25 20,77.25 18.5,77.25 17,77.25 14,77.25 14,75.75 14,73.5 30.64,72.74 32.75,72.75 16.25,49.5 16.25,51 16.25,52.5 16.25,54 16.25,59.25 16.25,60.75 16.25,62.25 25.25,59.25 25.25,60.75 25.25,62.25 25.25,63.75 25.25,65.25 26.75,65.25 26.75,63.75 26.75,62.25 26.75,60.75 26.75,59.25 28.25,59.25 30.5,68.25 29,68.25 26.75,68.25 26.75,69.75 25.25,52.5 26.75,52.5 28.25,52.5 29.75,52.5 31.25,52.5 32.75,52.5 34.25,52.5 35.75,52.5 35.75,51 35.75,49.5 34.25,49.5 34.25,51 32.75,51 31.25,51 29.75,51 28.25,51 26.75,51 25.25,51 20.75,49.5 20.75,51 20.75,52.5 20.75,54 37.52,49.5 37.52,51 37.52,52.5 37.52,54 39.31,49.5 39.31,51 39.31,52.5 39.31,54 39.31,55.5 39.31,57 18.55,49.51 18.55,51.01 18.55,52.51 18.55,54.01 42.02,49.5 42.02,51 42.02,52.4 42.02,54 42.02,55.5 42.02,57 41.72,59.2 28.39,72.74 27.66,80.81 31.34,80.78 3.5,42 3.5,45 3.5,48 3.5,51 3.5,54 3.5,57 3.5,60 3.5,63 3.5,66 3.5,69 3.5,72 3.5,75 3.5,78 3.5,81 6.5,81 9.5,81 9.5,84 6.5,84 6.5,42 6.5,45 9.5,42 9.5,45 6.5,48 6.5,51 6.5,54 6.5,57 6.5,60 6.5,63 6.5,66 6.5,69 6.5,72 9.5,48 9.5,51 9.5,54 9.5,57 9.5,60 9.5,63 9.5,66 9.5,69 9.5,72 45.5,57 45.5,60 45.5,63 45.5,66 45.5,69 45.5,72 45.5,75 45.5,78 45.5,81 48.5,57 48.5,60 48.5,63 48.5,66 48.5,69 48.5,72 48.5,75 48.5,78 48.5,81 51.5,57 51.5,60 51.5,63 51.5,66 51.5,69 51.5,72 51.5,75 51.5,78 51.5,81 54.5,57 54.5,60 54.5,63 54.5,66 54.5,69 54.5,72 54.5,75 54.5,78 54.5,81 57.5,57 57.5,60 57.5,63 57.5,66 57.5,69 57.5,72 57.5,75 57.5,78 57.5,81 60.5,57 60.5,60 60.5,63 60.5,66 60.5,69 60.5,72 60.5,75 60.5,78 60.5,81 63.5,57 63.5,60 63.5,63 63.5,66 63.5,69 63.5,72 63.5,75 63.5,78 63.5,81 66.5,57 66.5,60 66.5,63 66.5,66 66.5,69 66.5,72 66.5,75 66.5,78 66.5,81 69.5,57 69.5,60 69.5,63 69.5,66 69.5,69 69.5,72 69.5,75 69.5,78 69.5,81 72.5,48 72.5,51 72.5,54 72.5,57 72.5,60 72.5,63 72.5,66 72.5,69 72.5,72 75.5,48 75.5,51 75.5,54 75.5,57 75.5,60 75.5,63 75.5,66 75.5,69 75.5,72 81.5,48 81.5,51 81.5,54 81.5,57 81.5,60 81.5,63 81.5,66 81.5,69 81.5,72 78.5,48 78.5,51 78.5,54 78.5,57 78.5,60 78.5,63 78.5,66 78.5,69 78.5,72 81.5,45 78.5,45 75.5,45 72.5,45 69.5,45 66.5,45 63.5,45 60.5,45 57.5,45 36.5,84 33.5,84 30.5,84 27.5,84 24.5,84 21.5,84 18.5,84 15.5,84 12.5,84 63.5,84 60.5,84 57.5,84 54.5,84 51.5,84 48.5,84 45.5,84 42.5,84 39.5,84 81.5,84 78.5,84 75.5,84 72.5,84 69.5,84 66.5,84 81.5,81 78.5,81 75.5,81 72.5,81 72.5,78 72.5,75 81.5,75 81.5,78 12.5,81 15.5,81 18.5,81 21.5,81 24.5,81 33.5,81 36.5,81 42.5,81 39.5,81 3.5,39 6.5,39 9.5,39 12.5,42 12.5,45 12.5,39 15.5,39 15.5,36 12.5,36 12.5,33 15.5,33 33.5,30 36.5,30 36.5,27 39.5,27 39.5,30 39.5,36 36.5,36 33.5,36 30.5,36 42.5,39 39.5,39 39.5,45 30.5,45 27.5,45 42.5,30 45.5,30 48.5,30 48.5,27 45.5,27 42.5,27 36.5,24 36.5,21 39.5,21 39.5,24 42.5,24 42.5,21 45.5,21 45.5,24 48.5,24 48.5,21 48.5,18 45.5,18 42.5,18 39.5,18 36.5,18 36.5,15 39.5,15 42.5,15 45.5,15 48.5,15 66.5,15 69.5,15 72.5,15 75.5,15 78.5,15 81.5,15 81.5,18 81.5,21 81.5,27 81.5,30 81.5,36 78.5,36 75.5,36 72.5,36 59.81,33.06 66.5,27 66.5,21 69.5,21 72.5,21 75.5,21 69.5,24 69.5,27 78.86,33.02 69.5,39 66.5,39 66.5,42 63.5,42 69.5,42 72.5,42 72.5,39 75.5,39 75.5,42 78.5,42 78.5,39 81.5,39 81.5,42 54.5,45 51.5,45 81.5,12 81.5,9 81.5,6 78.5,12 75.5,12 72.5,12 69.5,12 66.5,12 63.5,12 72.5,9 72.5,6 72.5,3 75.5,3 78.5,3 69.5,3 69.5,6 66.5,3 63.5,3 60.5,3 57.5,3 54.5,3 51.5,3 48.5,3 45.5,3 42.5,3 39.5,3 36.5,3 33.5,3 30.5,3 27.5,3 24.5,3 21.5,3 18.5,3 15.5,3 12.5,3 9.5,3 6.5,3 3.5,6 3.5,9 3.5,12 6.5,12 9.5,12 12.5,12 15.5,12 15.5,9 15.5,6 12.5,6 12.5,9 3.5,15 3.5,18 3.5,21 15.5,15 6.5,24 3.5,24 18.5,33 18.5,36 18.5,39 18.5,42 15.5,42 18.5,45 21.5,45 21.5,36 21.5,39 21.5,42 24.5,33 24.5,36 24.5,39 24.5,45 33.5,12 36.5,12 39.5,12 42.5,12 51.5,12 54.5,12 60.5,12 57.5,12 33.5,27 33.5,15 33.5,18 33.5,21 58.67,28.24 53.3,23.99 62.41,33.04 62.41,29.57
  pour Top (isolate 0.305): -3.5,-1 -3.5,87 88.5,87 88.5,-1
  pour Bottom (isolate 0.203): -6.5,1 -6.5,-3 -6.5,-4 -1.5,-4 91.5,-4 91.5,2 91.5,87 91.5,90 88.5,90 -6.5,90 -6.5,85
  pour Route2 (isolate 0.406): -4.5,68 -4.5,88 89.5,88 89.5,79 89.5,-2 71.5,-2 -4.5,-2 -4.5,11
  pour Route15 (isolate 0.406, rank 2): -5.5,-3 90.5,-3 90.5,15 90.5,89 -5.5,89
MISO  (via drill 0.35)
  Top 0.203: IC1.17 14.75,71.23 v14.25,70.73 | v20.1,33.15 21.21,32.04 IC4.16
  Bottom 0.203: v20.1,33.15 20.07,33.15 19.74,33.48 19.74,42.52 19.08,43.18 15.15,43.18 14.17,44.16 14.17,66.15 13.78,66.54 13.78,67.74 14.44,68.4 14.44,70.54 v14.25,70.73
MOSI  (via drill 0.35)
  Top 0.203: IC1.18 15.23,70.58 14.22,69.57 v13.69,69.57 | v19.87,32.18 20.71,31.34 IC4.17
  Bottom 0.203: v19.87,32.18 19.27,32.78 19.27,42.31 18.87,42.71 14.98,42.71 13.73,43.96 13.73,65.97 13.35,66.35 13.35,67.94 13.69,68.28 v13.69,69.57
N$1
  Top 0.42: L2.2 C11.1
N$2
  Top 0.254: L5.1 C12.1
  Top 0.42: C14.1 20.96,61.74 | 20.96,61.74 L5.1 | 20.96,61.74 20.99,61.77 C11.2
N$3
  Top 0.254: C13.1 20.53,60.66 L5.2
  Top 0.42: C14.2 20.94,60.64 | 20.94,60.64 L5.2 | C17.1 20.94,60.64
N$4
  Top 0.305: S1.6 C17.2
N$5
  Top 0.406: C15.2 C16.1
N$6
  Top 0.305: C18.1 21.22,56.05 S1.4
N$7
  Top 0.305: C19.1 19.39,56.14 19.49,56.24 S1.3
N$8
  Top 0.42: R1.2 C19.2
N$9
  Top 0.42: I5.1 C27.2 C26.1
N$10  (via drill 0.35)
  Top 0.203: S2.5 S2.5 arc-90 S2.5 | v30.46,71.27 30.46,71.21 30.12,70.87 S2.5 | C37.1 36.71,43.61 | 36.71,43.61 v36.71,43.65 | 36.71,43.61 36.72,43.6 IC2.4 36.72,41.22 36.35,40.85 35.14,40.85 34.82,40.53 IC2.1
  Route15 0.203: v36.71,43.65 38.42,45.36 38.42,68.33 35.48,71.27 v30.46,71.27
N$11  (via drill 0.35)
  Top 0.203: IC9.4 C20.2 26.27,41.79 v26.06,42 | S1.2 18.91,56.82 v18.55,57.17
  Route15 0.203: v26.06,42 23.11,42 19.53,45.58 19.53,56.33 18.69,57.17 v18.55,57.17
N$12
  Top 0.42: R2.1 I5.2
N$13
  Top 0.42: IC3.1 35.59,62.03 R2.2
N$14
  Top 0.254: IC3.3 I7.2
  Top 0.42: I6.1 IC3.3
N$15
  Top 0.42: I6.2 C28.1 C29.1
N$16
  Top 0.254: S2.4 arc90 29.8,70.08
  Top 0.42: C28.2 29.8,70.08
N$17
  Top 0.203: C33.1
  Top 0.3: S2.6 C33.1
N$18  (via drill 0.35)
  Top 0.254: TR1.3 v59.13,40.05 | v59.13,40.05 v59.14,40.04 | R4.2 60.19,40.05 v59.13,40.05 | TR1.1 v59.13,37.51 v59.14,37.5
  Bottom 0.254: v59.14,40.04 58.7,40.04 58.23,39.57 58.23,38.03 58.76,37.5 v59.14,37.5
N$19  (via drill 0.35)
  Top 0.254: TR2.3 v48.76,36.62 | v48.76,36.62 v48.75,36.62 | v46.23,36.61 46.23,37.9 TR2.1 | R3.2 48.76,35.55 v48.76,36.62
  Bottom 0.254: v48.75,36.62 48.75,37.33 48.42,37.66 46.54,37.66 46.23,37.35 v46.23,36.61
N$20  (via drill 0.35)
  Top 0.203: S2.2 v27.31,70.87 | IC2.6 34.74,42.57 v33.95,42.57 33.95,43.45 C36.2
  Route15 0.203: v27.32,70.86 v27.31,70.87 27.31,70.73 28.38,69.66 35.04,69.66 36.67,68.02 36.67,45.87 33.95,43.15 v33.95,42.57
N$22  (via drill 0.35)
  Top 0.203: TR3.3 61.53,40.91 61.07,41.37 60.56,41.37 R4.1
  Top 0.254: TR1.4 59.12,41.31 | 59.12,41.31 v59.13,41.3 | R4.1 60.15,41.31 59.12,41.31 | TR1.2 v59.13,38.77 v59.14,38.77
  Bottom 0.254: v59.13,41.3 59.7,41.3 60.09,40.91 60.09,39.1 59.76,38.77 v59.14,38.77
N$23  (via drill 0.35)
  Top 0.254: TR2.4 v50.02,36.62 | v50.02,36.62 v50.03,36.62 | v47.48,36.62 TR2.2 | R3.1 50.02,35.48 50.02,35.61 | 50.02,35.61 v50.02,36.62 | TR6.3 49.79,34.27 50.07,34.55 50.07,35.56 50.02,35.61
  Bottom 0.254: v50.03,36.62 50.03,35.99 49.69,35.65 47.8,35.65 47.48,35.97 v47.48,36.62
N$24  (via drill 0.35)
  Top 0.203: R16.2 27.07,27.5 25.22,25.65 IC4.10 22.6,25.65 v22.34,25.39 | v24.54,28.7 24.54,30.47 R23.2
  Bottom 0.203: v22.34,25.39 22.64,25.69 24.04,25.69 24.54,26.19 v24.54,28.7
N$25
  Top 0.203: IC4.20 19.21,29.26 R5.2
N$26  (via drill 0.35)
  Top 0.203: R17.2 27.29,28.37 25.07,26.15 IC4.11 22.6,26.15 v22.34,26.41 | v23.75,29.48 R24.2
  Bottom 0.203: v22.34,26.41 23.02,26.41 23.75,27.14 v23.75,29.48
N$27  (via drill 0.35)
  Top 0.203: v21.76,57.26 21.76,57.15 21.43,56.83 S1.5 | IC9.6 29.24,41.57 28.97,41.84 27.64,41.84 27.34,42.14 IC9.3 27.22,43.32 C21.1 25.76,43.55 v25.76,44.19
  Route15 0.203: v21.76,57.26 21.73,57.23 21.73,46.38 23.92,44.19 v25.76,44.19
N$28
  Top 0.203: IC4.5 26.85,23.15 R18.2 29.98,22.55 Q2.1 C39.1
N$29
  Top 0.203: IC4.6 26.86,23.65 R18.1 28.28,24.25 Q2.3 29.03,24.19 29.51,23.71 C40.1
N$30
  Top 0.254: U2.4 60.23,22.59 L1.1
N$31
  Top 0.203: R9.2 R8.1 75.09,28.74 74.88,28.95 U1.3
N$32
  Top 0.254: L4.1 73.39,25.5 U1.5 73.39,31.57 C47.1
N$33
  Top 0.254: U2.5 60.39,23.09 L1.2
N$34
  Top 0.203: U1.1 74.51,30.15 C47.2
N$35  (via drill 0.35)
  Top 0.203: IC4.1 24.84,21.15 25.09,20.9 v25.09,19.18
  Bottom 0.203: VBAT.1 v25.1,19.19 v25.09,19.18
N$36
  Top 0.203: R12.2 56.36,26.14 56.04,25.82 C51.2
N$37  (via drill 0.35)
  Top 0.203: 57.74,27.32 57.74,27.3 57.75,27.3 57.75,25.35 57.54,25.14 C51.1 57.12,25.12 v57.12,24.22 | R10.1 57.74,27.32 | R11.2 C52.2 60.17,27.46 57.88,27.46 57.74,27.32
  Top 0.254: U2.9 55.31,21.59 55.02,21.3 v55.02,20.37 v55.03,20.36
  Bottom 0.203: v55.03,20.36 55.46,20.79 56.81,20.79 57.12,21.1 v57.12,24.22
N$38
  Top 0.203: IC4.44 R19.1
N$39
  Top 0.203: R13.1 59.66,26.03 C52.1
N$40  (via drill 0.35)
  Top 0.203: R13.2 58.5,24.8 v58.11,24.41 | v55.95,19.91 U2.10
  Bottom 0.203: v58.11,24.41 58.11,21 57.02,19.91 v55.95,19.91
N$41
  Top 0.254: U2.1 58.86,19.59 R14.1
N$42  (via drill 0.35)
  Top 0.203: v28.12,19.3 27.27,19.3 26.52,20.05 26.52,21.74 25.61,22.65 IC4.4
  Bottom 0.203: PC15.1 v28.12,19.3
N$44  (via drill 0.35)
  Top 0.203: IC4.3 25.45,22.15 26.08,21.52 26.08,19.84 28.07,17.85 v28.07,17.41
  Bottom 0.203: PC14.1 29.39,17.4 v28.08,17.4 v28.07,17.41
N$45  (via drill 0.35)
  Top 0.203: IC4.2 25.28,21.65 25.6,21.33 25.6,19.67 27.34,17.93 27.34,15.79 27.58,15.55 v28.09,15.55
  Bottom 0.203: PC13.1 v28.09,15.55
N$46  (via drill 0.35)
  Top 0.203: v4.92,33.16 4.92,31.97 5.63,31.26 10.79,31.26 11.77,30.27 11.77,26.82 12.94,25.65 IC4.27
  Bottom 0.203: v4.92,33.16 4.92,34.58 MISO2.1
N$47  (via drill 0.35)
  Top 0.203: v3,33.16 3,31.52 3.76,30.76 9.87,30.76 10.1,30.76 10.71,30.76 11.35,30.12 11.35,26.61 12.8,25.15 IC4.28
  Bottom 0.203: v3,33.16 MOSI2.1
N$48  (via drill 0.35)
  Top 0.203: v6.73,27.12 6.73,27.84 7.21,28.32 9.46,28.32 9.89,27.89 9.89,23.32 10.56,22.65 IC4.33
  Bottom 0.203: PA12.1 v6.73,27.12
N$49  (via drill 0.35)
  Top 0.203: v4.83,27.14 4.83,27.93 5.66,28.76 9.69,28.76 10.33,28.12 10.33,23.57 10.75,23.15 IC4.32
  Bottom 0.203: PA11.1 v4.83,27.14
N$50  (via drill 0.35)
  Top 0.203: v3,27.15 3,28.13 4.06,29.19 9.91,29.19 10.79,28.31 10.79,26.47 12.61,24.65 IC4.29
  Bottom 0.203: v3,27.15 PA8.1
N$68  (via drill 0.35)
  Top 0.203: v6.83,33.17 6.83,32.23 7.3,31.76 10.96,31.76 12.2,30.52 12.2,27.04 13.09,26.15 IC4.26
  Bottom 0.203: v6.83,33.17 SCK2.1
N$69  (via drill 0.35)
  Top 0.203: v8.72,33.2 8.72,32.57 9.03,32.26 11.04,32.26 12.65,30.65 12.65,27.27 13.27,26.65 IC4.25
  Bottom 0.203: v8.72,33.2 NSS2.1
NSSL  (via drill 0.35)
  Top 0.203: v14.87,67.15 v14.86,67.16 14.86,69.58 15.22,69.93 IC1.19 | v21.24,34.14 22.21,33.17 IC4.14
  Bottom 0.203: 14.95,67.07 v14.87,67.15 15.04,66.98 15.04,44.61 15.5,44.15 19.49,44.15 20.71,42.93 20.71,34.67 v21.24,34.14
NTRX_EN  (via drill 0.35)
  Top 0.203: v56.53,14.86 56.53,15.51 56.76,15.74 R15.2 54.79,19.17 54.37,19.59 54.37,21.75 54.71,22.09 U2.8
  Bottom 0.203: v56.53,14.86 56.53,13.33 56.12,12.92 TP15.1
PB7  (via drill 0.35)
  Top 0.203: IC4.43 20.21,18.55 19.79,18.13 18.1,18.13 17.58,17.61 17.58,14.2 18.04,13.74 v19.07,13.74
  Bottom 0.203: PB7.1 v19.06,13.73 v19.07,13.74
PB8  (via drill 0.35)
  Top 0.203: IC4.45 21.21,18.42 21.46,18.17 21.46,14.42 20.94,13.9 v20.94,13.76
  Bottom 0.203: v20.94,13.76 PB8.1
PB9  (via drill 0.35)
  Top 0.203: IC4.46 21.71,18.62 21.94,18.39 21.94,14.52 v22.74,13.72
  Bottom 0.203: v22.74,13.72 PB9.1
PROG_BOOT0  (via drill 0.35)
  Top 0.203: R19.2 R20.2 v20.71,14.77
  Bottom 0.203: v20.71,14.77 R20.2 20.09,16.38 11.07,16.38 10.43,15.74 SV2.6 10.43,15.2 11.21,14.42 13.34,14.42 14.72,13.04 14.72,5.85 15.33,5.24 62.86,5.24 63.5,5.88 63.5,8.3 CN1.3
PROG_RST  (via drill 0.35)
  Top 0.203: IC4.7 23.02,24.15 22.59,23.72 22.59,21.25 23.85,19.99 23.85,18.79 24.61,18.04 25.68,18.04 26.05,17.67 26.05,15.93 25.82,15.7 R21.1 25.28,15.75 v24.37,15.75
  Bottom 0.203: v24.37,15.75 21.44,15.75 20.33,16.86 8.55,16.86 7.89,16.2 SV2.5 7.89,14.83 8.73,13.99 13.11,13.99 14.27,12.83 14.27,5.66 15.18,4.75 63.75,4.75 64.5,5.5 CN1.4
PROG_RX  (via drill 0.35)
  Top 0.203: IC4.31 11.38,23.65 v11.2,23.84
  Bottom 0.203: v11.2,23.84 10.43,23.07 SV2.2 10.43,20.06 9.71,19.34 6.76,19.34 6.19,18.77 6.19,14.26 6.95,13.5 12.93,13.5 13.81,12.62 13.81,5.42 14.95,4.29 64.59,4.29 65.5,5.2 65.5,8.3 CN1.1
PROG_TX  (via drill 0.35)
  Top 0.203: IC4.30 11.9,24.15 v11.19,24.86
  Bottom 0.203: v11.19,24.86 9.63,23.3 9.63,22.1 8.14,20.61 SV2.1 6.42,20.61 5.77,19.96 5.77,14.06 6.78,13.05 12.69,13.05 13.38,12.36 13.38,5.17 14.72,3.83 65.38,3.83 66.5,4.95 CN1.2
RF_RX
  Top 0.254: S2.3 28.02,70.33 28.02,70.16
  Top 0.42: 28.02,70.16 28.01,70.15 28.01,68.85 28.01,68.56 arc-90 C16.2
RFI
  Top 0.305: C15.1 L3.1
  Top 0.406: IC1.1 22.02,67.83 arc90 22.75,67.09 C15.1
RFO
  Top 0.203: I1.2 20.12,65.74 L2.1
  Top 0.42: C10.1 L2.1 IC1.28
RST_L  (via drill 0.35)
  Top 0.203: v17.8,74.79 17.8,75.56 18.57,76.33 21.55,76.33 22.02,75.86 IC1.7 | v18.02,31.85 18.71,31.16 IC4.21
  Bottom 0.203: v17.8,74.79 17.52,74.51 11.15,74.51 10.76,74.12 10.76,41.27 11.41,40.62 16.73,40.62 17.56,39.8 17.56,32.31 v18.02,31.85
RX/TX_CON  (via drill 0.35)
  Top 0.203: IC2.3 v36.72,38.32 | IC4.39 18.21,21.01 18.39,21.19 18.39,22.98 v18.81,23.4
  Bottom 0.203: v36.72,38.32 36.72,38.26 36.29,37.83 28.93,37.83 28.05,36.95 28.05,24.09 27.36,23.4 v18.81,23.4
SCK  (via drill 0.35)
  Top 0.203: IC1.16 v14.24,71.88 | v21.21,33.11 21.71,32.61 IC4.15
  Bottom 0.203: 21.21,33.21 v21.21,33.11 20.24,34.08 20.24,42.68 19.26,43.66 15.34,43.66 14.61,44.39 14.61,66.35 14.2,66.76 14.2,67.53 15,68.33 15,71.42 14.54,71.88 v14.24,71.88
SWCLK  (via drill 0.35)
  Top 0.203: IC4.37 17.21,18.91 16.4,18.1 15.4,18.1 v15.37,18.13
  Bottom 0.203: v15.37,18.13 15.3,18.2 SWCLK.1
SWIO  (via drill 0.35)
  Top 0.203: IC4.34 14.03,22.15 v13.78,21.9
  Bottom 0.203: SWIO.1 13.47,22.21 v13.78,21.9
TOANT
  Top 0.406: TP14.1 29.5,74.94 C33.2
UNREG1  (via drill 0.35, 0.41)
  Top 0.203: U1.4 | 76.11,27.4 L4.2
  Top 0.254: U1.4 74.32,28.18
  Top 0.26: U2.7 54.33,22.59
  Top 0.305: 74.32,28.18 74.85,27.65 v75.49,27.65 75.86,27.65 76.11,27.4 | C53.1 53.84,22.1 54.33,22.59
  Top 0.406: C53.1 53.84,15.51 53.88,15.51 | 53.88,15.51 v53.88,14.97 | 53.88,15.51 54.42,15.51 v54.67,15.77
  Top 1.016: L4.2 76.36,25.73 C48.1 v77.85,24.39 v77.84,24.38 v77.84,23.33
  Route15 1.016: CN1.24 CN1.23 44.5,10.73 45.16,11.39 49.18,11.39 49.9,12.11 49.9,13.87 51,14.97 v53.88,14.97 v54.67,15.77 55.53,16.62 75.3,16.62 77.84,19.16 v77.84,23.33 77.84,24.91
XTA
  Top 0.203: IC1.5 22.38,71.23 23.52,72.37 25.32,72.37 25.89,72.94 Q1.3 C24.1
XTB
  Top 0.203: IC1.6 22.42,71.88 22.74,72.2 22.74,74.9 23.2,75.36 Q1.1 C23.2

## Text on the board
tPlace: RX | TX | U2 | GND | 3V3 | RST | B0